# Altium PCB V0_1MiniFlyer-ZK.PcbDoc
Units mil, origin at the board's own origin, x right, y up, seen from the top; angles counter-clockwise.
Board outline 1500 x 1500 mil, 2 copper layers (Top Layer, Bottom Layer); 44 components, 36 nets, 202 pads, 17 vias.
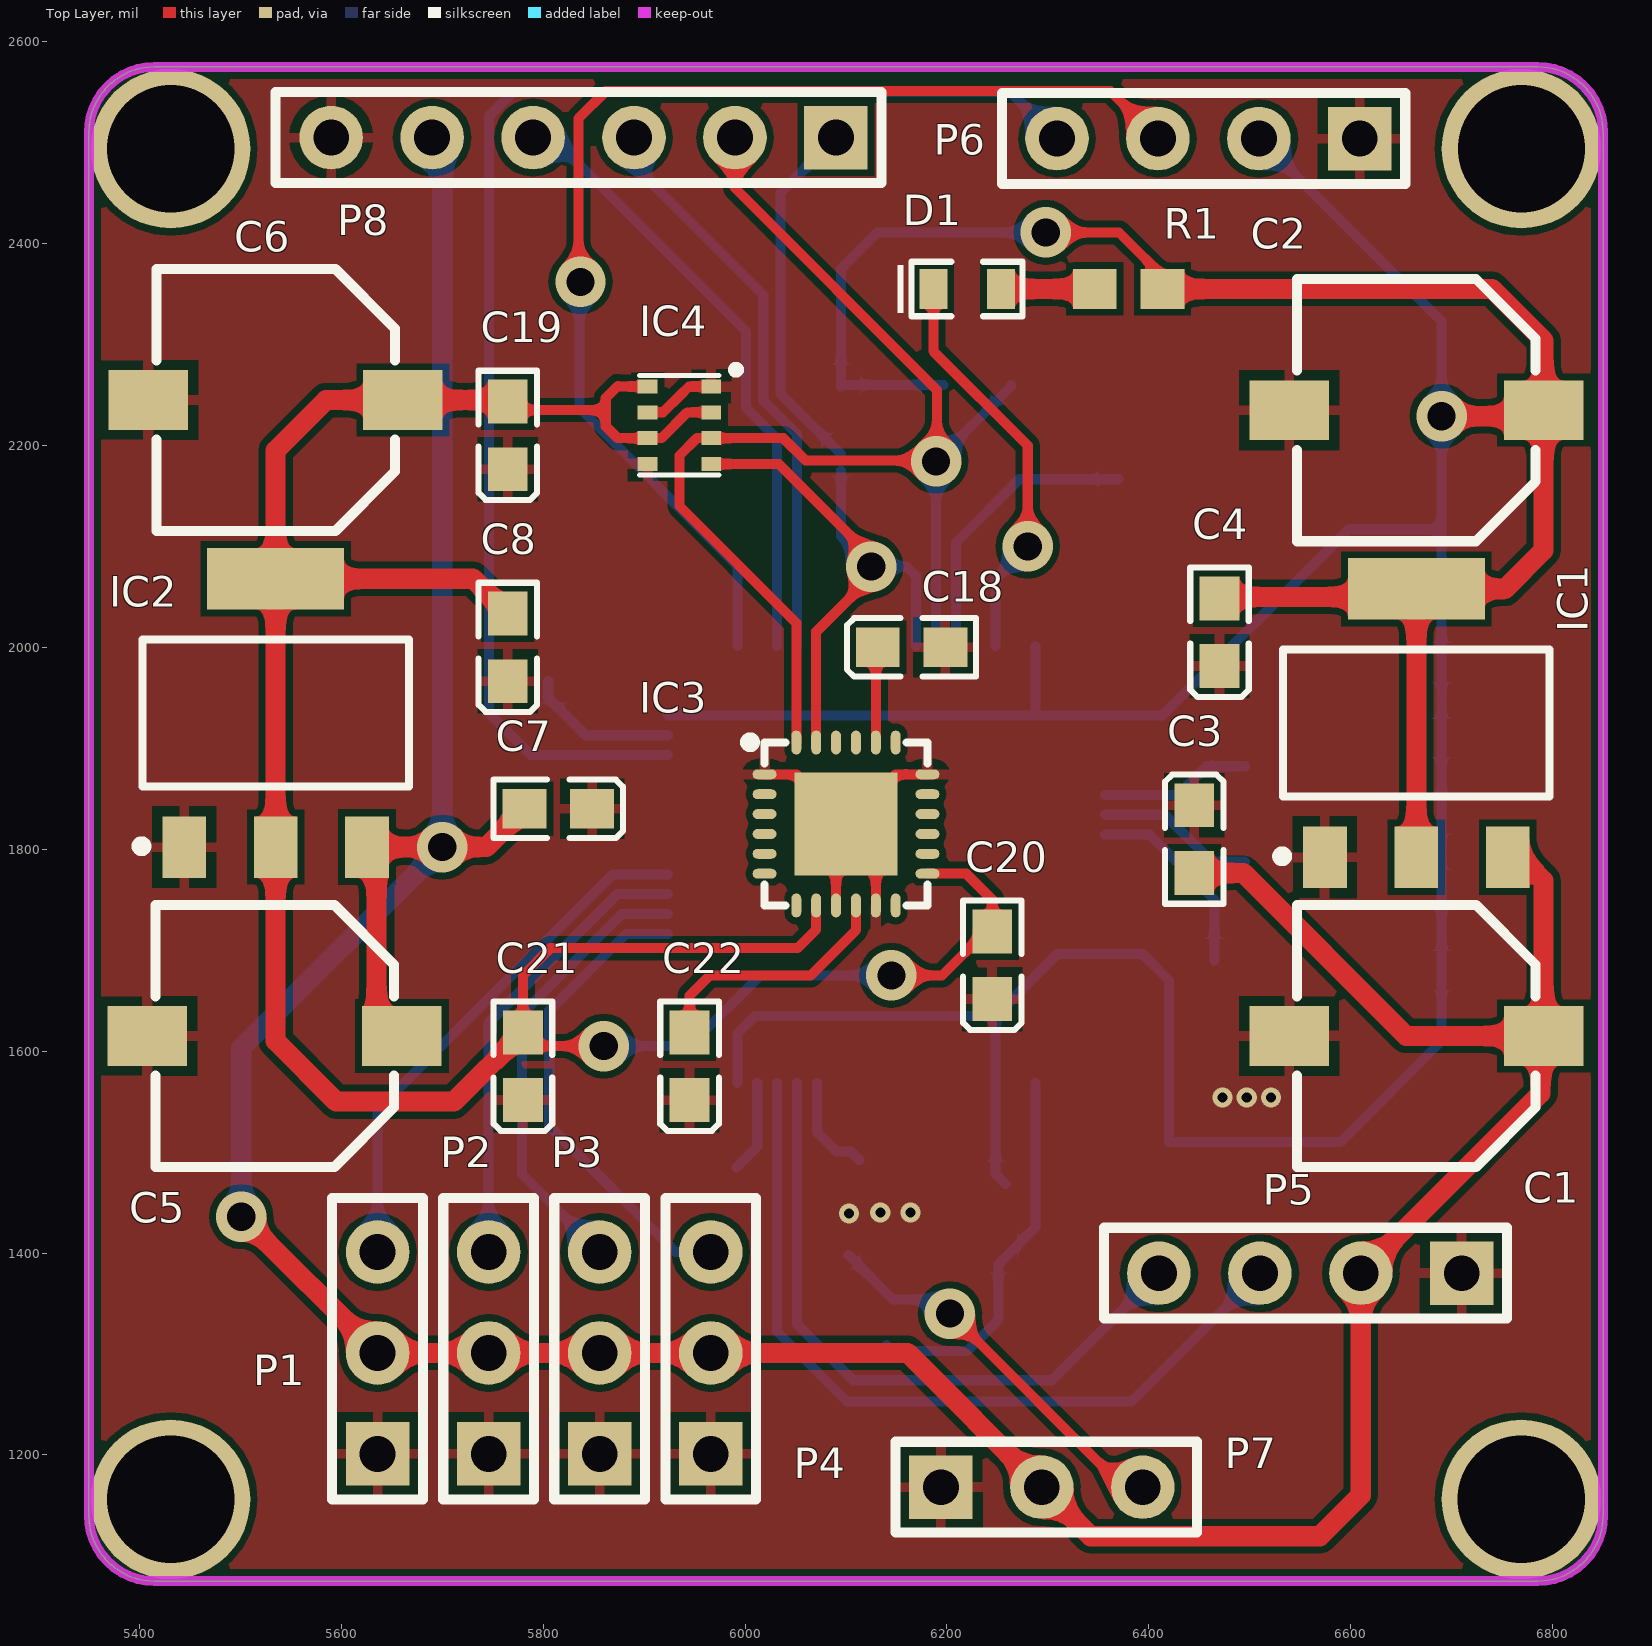
[diagram p0: Top Layer view]
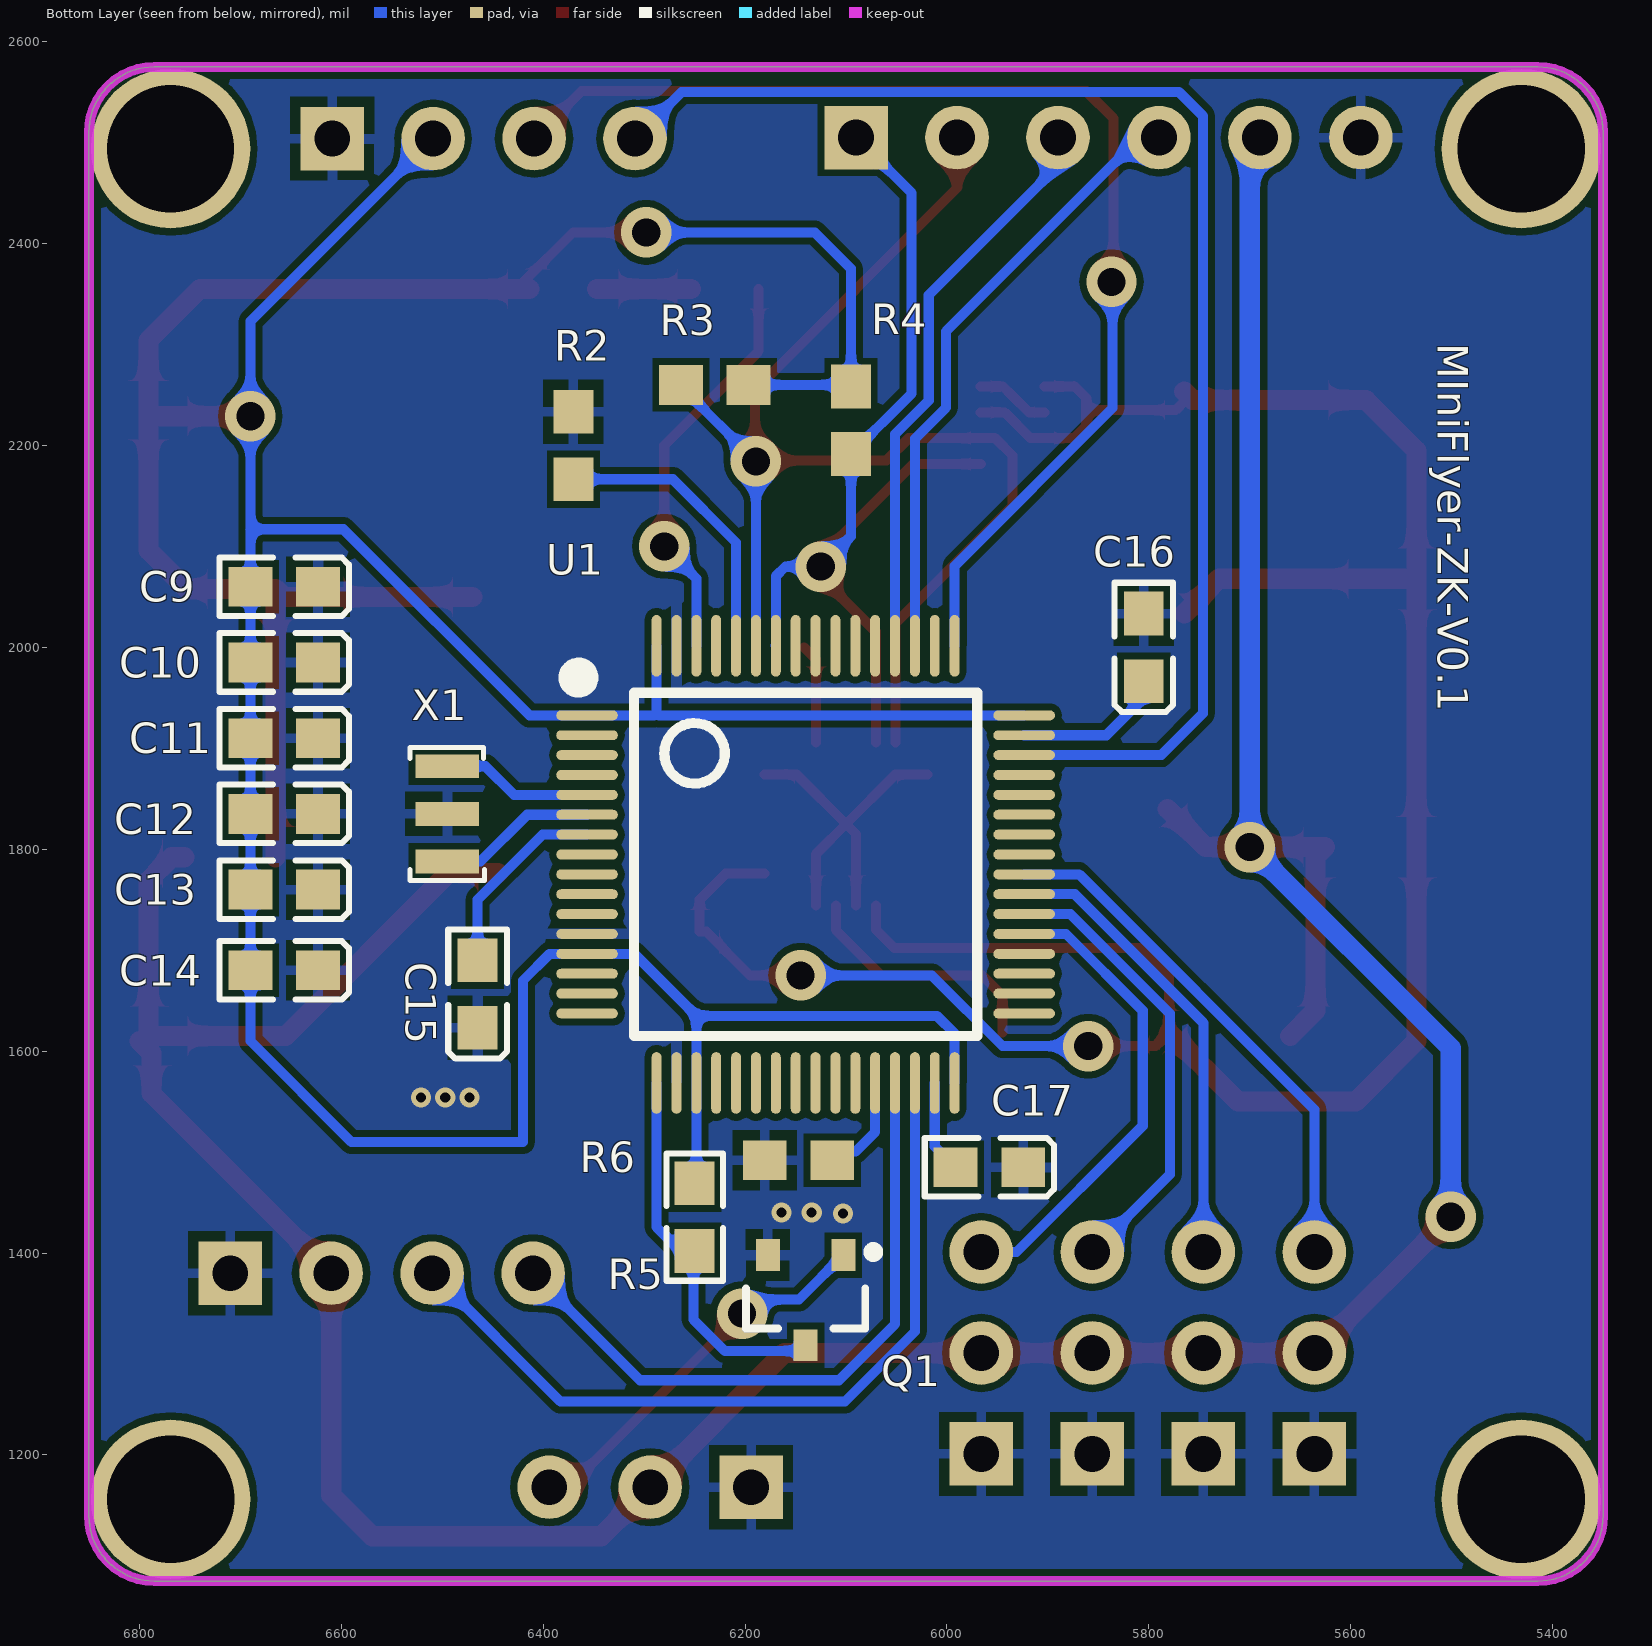
[diagram p1: Bottom Layer view, seen from below]
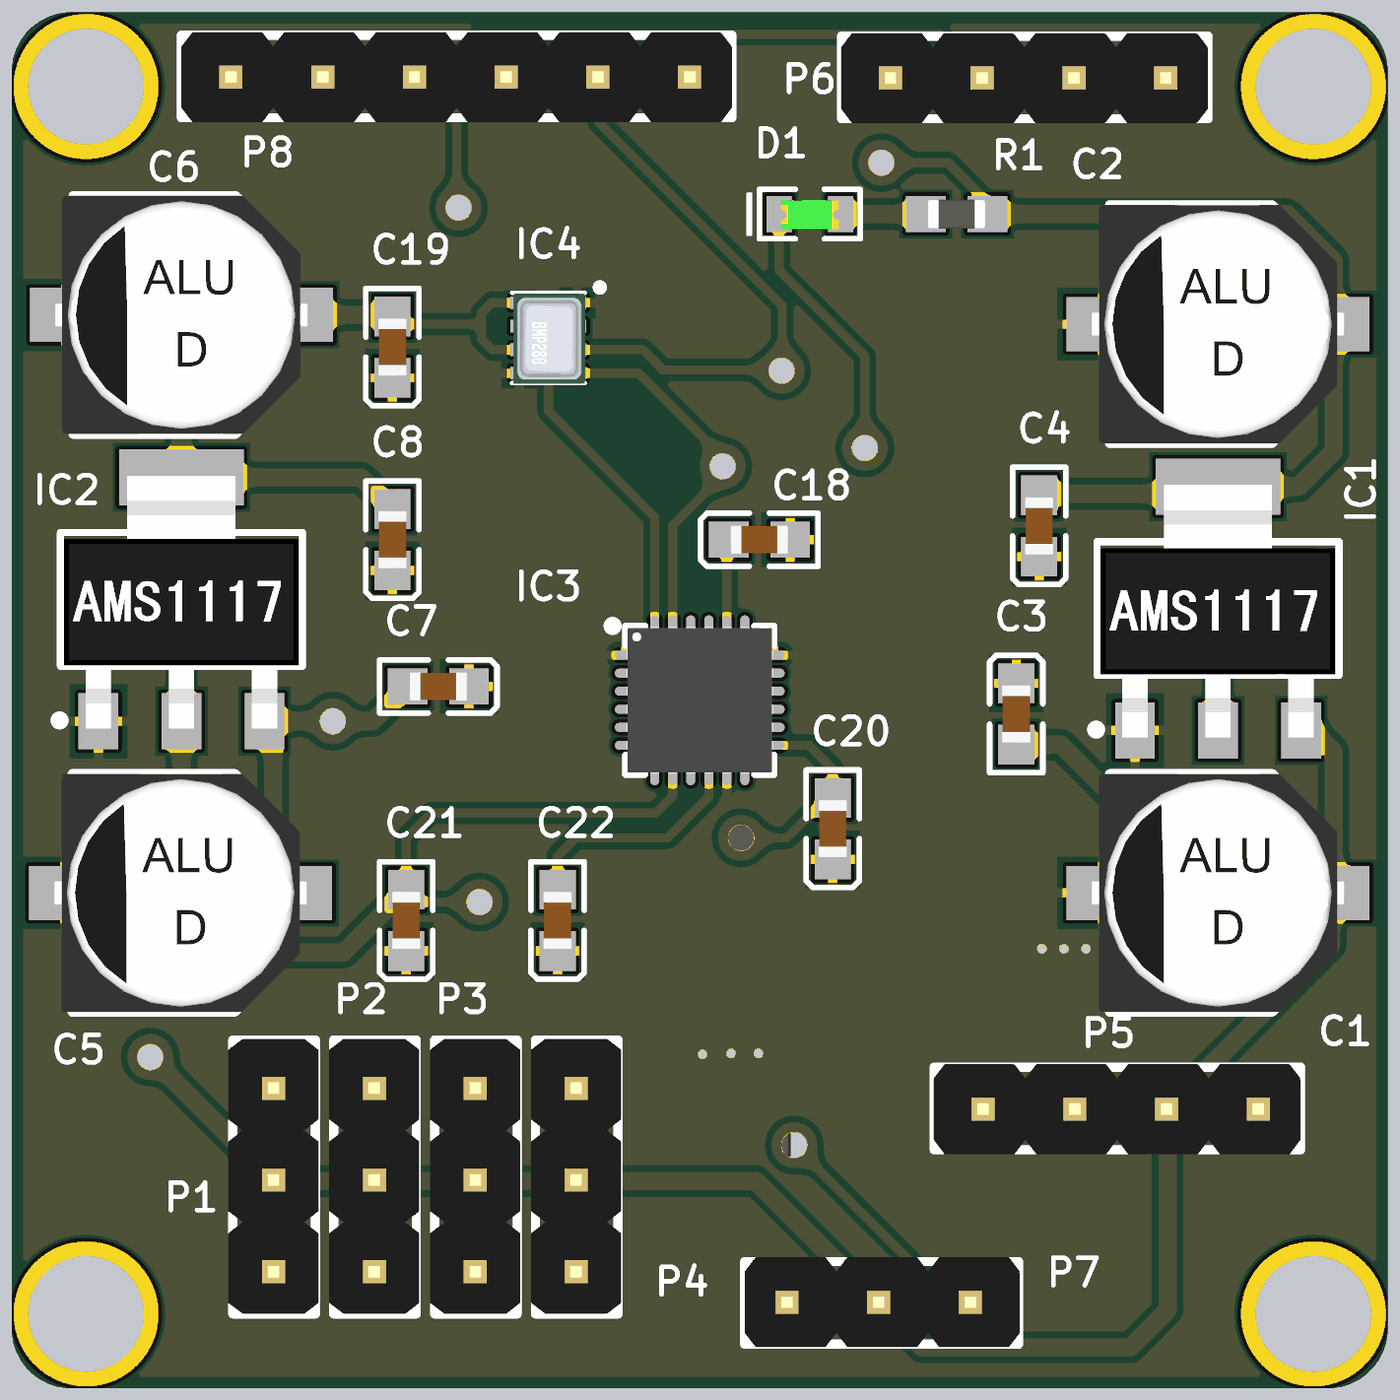
[diagram p2: 3D render of the assembled board from above, using the file's embedded part models]
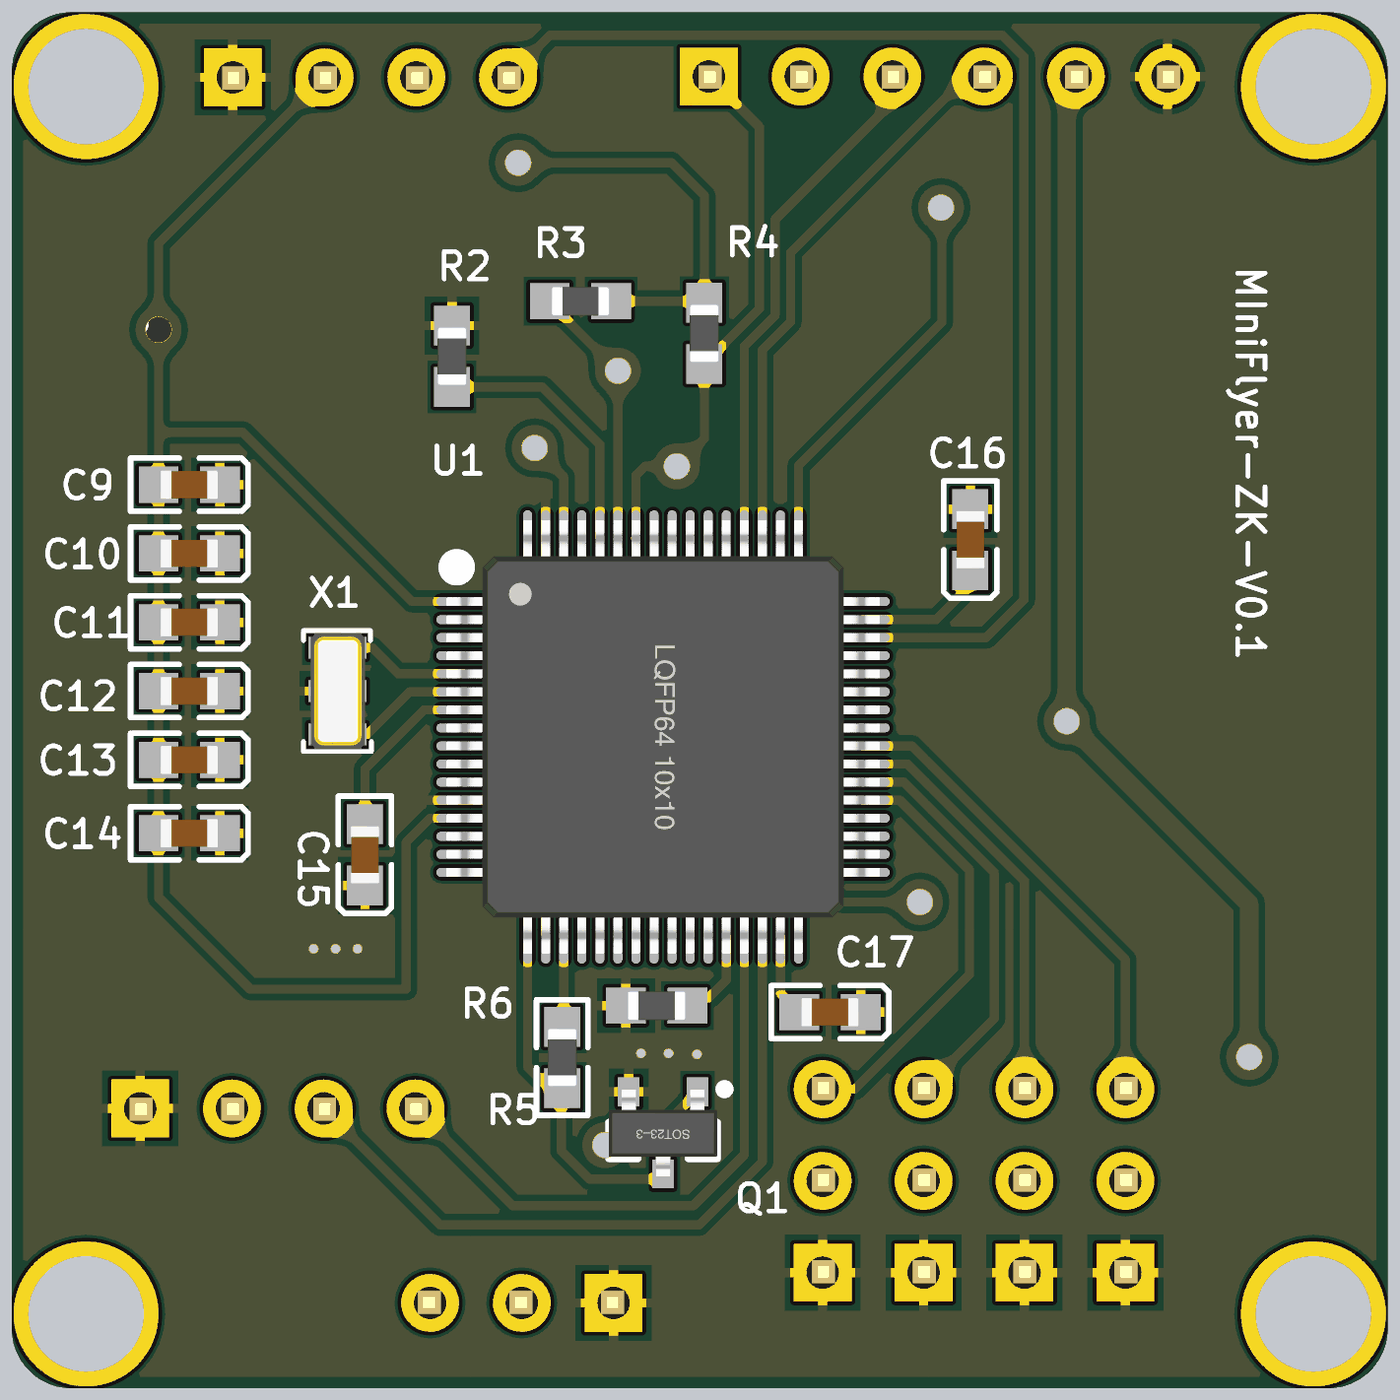
[diagram p3: 3D render of the assembled board from below, using the file's embedded part models]

## Layer stack, top to bottom
Top Solder: solder mask 0.4, Solder Resist, Dk 3.5
Top Layer: signal copper 1.4
Dielectric 1: dielectric 12.6, FR-4, Dk 4.8
Bottom Layer: signal copper 1.4
Bottom Solder: solder mask 0.4, Solder Resist, Dk 3.5

## Board outline
5350,1140 5350,2510 cw(c5415,2510) 5415,2575 6785,2575 cw(c6785,2510) 6850,2510 6850,1140 cw(c6785,1140) 6785,1075 5415,1075 cw(c5415,1140)

## Design rules (kind name [scope] priority, off if disabled: settings)
Clearance [All] p1: gap=7
PolygonConnect [All] p1: connectstyle=Relief reliefconductorwidth=10 reliefentries=4 polygonreliefangle="90 Angle" airgapwidth=10
RoutingVias [All] p1: holewidth=10 width=20 viastyle="Through Hole" minholewidth=10 minwidth=20 maxholewidth=10 maxwidth=20
SolderMaskExpansion [All] p1: expansion=4
Width [All] p1: maxlimit=20 minlimit=10 preferedwidth=10 minimp=50.000000 maximp=50.000000 favimp=50.000000
30 further rules are at their usual default settings.

## Components (designator, comment, footprint, x,y, rotation, side; value= is the part's Value field where it differs from the comment)
C1 "220uf" CAPE_D_6.3X6.6X5.4 6665,1615 r0 top
C2 "220uf" CAPE_D_6.3X6.6X5.4 6665,2235 r0 top
C3 "0.1uf" Cap-0603 6445,1810 r270 top
C4 "0.1uf" Cap-0603 6470,2015 r90 top
C5 "220uf" CAPE_D_6.3X6.6X5.4 5534.02,1615 r0 top
C6 "220uf" CAPE_D_6.3X6.6X5.4 5535,2245 r0 top
C7 "0.1uf" Cap-0603 5815,1840 r180 top
C8 "0.1uf" Cap-0603 5765,2000 r90 top
C9 "0.1uf" Cap-0603 6656.54,2060 r0 bottom
C10 "0.1uf" Cap-0603 6656.54,1985 r0 bottom
C11 "0.1uf" Cap-0603 6656.54,1910 r0 bottom
C12 "0.1uf" Cap-0603 6656.54,1835 r0 bottom
C13 "0.1uf" Cap-0603 6656.54,1760 r0 bottom
C14 "0.1uf" Cap-0603 6656.54,1680 r0 bottom
C15 "0.1uf" Cap-0603 6465,1656.54 r90 bottom
C16 "2.2uf" Cap-0603 5805,2000 r90 bottom
C17 "2.2uf" Cap-0603 5958,1485 r0 bottom
C18 "2.2nf" Cap-0603 6165,2000 r0 top
C19 "0.1uf" Cap-0603 5765,2210 r90 top
C20 "0.1uf" Cap-0603 6245,1685 r90 top
C21 "10nf" Cap-0603 5780,1585 r90 top
C22 "0.1uf" Cap-0603 5945,1585 r90 top
D1 "LED_SMD_GREEN" LED_0603_G 6220,2355 r180 top
IC1 "AMS1117-3.3" AMS1117 6665,1925 r0 top
IC2 "AMS1117-3.3" AMS1117 5535,1935 r0 top
IC3 "MPU-6050" "QFN24 4X4_N" 6100,1825 r0 top locked
IC4 "BMP280" "BMP280 LGA8" 5935,2220 r180 top
P1 "PWM1" "Header 2.54X3" 5636,1301 r90 top
P2 "PWM2" "Header 2.54X3" 5746,1301 r90 top
P3 "PWM3" "Header 2.54X3" 5856,1301 r90 top
P4 "PWM4" "Header 2.54X3" 5966,1301 r90 top
P5 "UART1" "Header 2.54X4" 6560,1380 r180 top
P6 "SWD" "Header 2.54X4" 6459,2504 r180 top
P7 "SBUS" "Header 2.54X3" 6294,1168 r0 top
P8 "GPS" "Header 2.54X6" 5840,2505 r180 top
Q1 "SS8050" SOT23-3L 6140,1353 r0 bottom
R1 "330R" Res-0603-M 6380,2355 r0 top
R2 "10K" Res-0603-M 6370,2200 r90 bottom
R3 "4.7K" Res-0603-M 6230,2260 r180 bottom
R4 "4.7K" Res-0603-M 6095,2225 r90 bottom
R5 "10K" Res-0603 6250,1435.54 r270 bottom
R6 "10K" Res-0603-M 6147,1492 r180 bottom
U1 "STM32F405RGT6" "LQFP64 10X10_L" 6140,1785 r270 bottom
X1 "8MHz" XTAL-3215-3P 6495,1835 r270 bottom

## Footprints (in the part's own frame and the unit in brackets; to place one, negate y for a bottom-side part, rotate by r counter-clockwise, add the part's x,y. Pads: shape width x height; smd on the part's side, far side on the other; paste and mask are expansions set on the pad)
AMS1117 [mm]
  rect 1.1x1.55 smd: 1(-2.3,-3.375) 2(0,-3.375) 3(2.3,-3.375)
  rect 3.45x1.55 smd: 4(0,3.375)
  silkscreen extent -3.5,-3.48 3.35,1.85, body extent -3.25,-3.58 3.25,3.42, height 1.85
"BMP280 LGA8" [mm]
  rect 0.5x0.35 smd: 1(-0.8,-0.975) 2(-0.8,-0.325) 3(-0.8,0.325) 4(-0.8,0.975) 5(0.8,0.975) 6(0.8,0.325) 7(0.8,-0.325) 8(0.8,-0.975)
  silkscreen extent -1.52,-1.5 1,1.25, body extent -1.03,-1.23 0.97,1.27, height 1
Cap-0603 [mm]
  rect 1.1x1 smd: 1(-0.85,0) 2(0.85,0)
  silkscreen extent -1.63,-0.74 1.63,0.74, body extent -0.8,-0.4 0.8,0.4, height 0.6
CAPE_D_6.3X6.6X5.4 [mm]
  rect 2x1.5 smd: 1(3.2,0) 2(-3.2,0)
  silkscreen extent -3,-3.3 3,3.3, body extent -3.5,-3.3 3.5,3.3, height 5.4
"Header 2.54X3" [mm]
  rect 1.6x1.6 hole 0.9: 1(-2.54,0)
  round 1.6 hole 0.9: 2(0,0) 3(2.54,0)
  silkscreen extent -3.68,-1.14 3.9,1.14, body extent -3.68,-1.23 3.94,1.27, height 8.3
"Header 2.54X4" [mm]
  rect 1.6x1.6 hole 0.9: 1(-3.81,0)
  round 1.6 hole 0.9: 2(-1.27,0) 3(1.27,0) 4(3.81,0)
  silkscreen extent -4.95,-1.14 5.19,1.14, body extent -4.95,-1.23 5.21,1.27, height 8.3
"Header 2.54X6" [mm]
  rect 1.6x1.6 hole 0.9: 1(-6.35,0)
  round 1.6 hole 0.9: 2(-3.81,0) 3(-1.27,0) 4(1.27,0) 5(3.81,0) 6(6.35,0)
  silkscreen extent -7.49,-1.14 7.75,1.14, body extent -7.49,-1.23 7.75,1.27, height 8.3
LED_0603_G [mm]
  rect 0.7x1 smd: 1(-0.85,0) 2(0.85,0)
  silkscreen extent -1.4,-0.69 1.75,0.69, body extent -0.8,-0.38 0.8,0.42, height 0.61
"LQFP64 10X10_L" [mm]
  oval 0.25x1.55 smd: 1(-3.75,-5.5) 2(-3.25,-5.5) 3(-2.75,-5.5) 4(-2.25,-5.5) 5(-1.75,-5.5) 6(-1.25,-5.5) 7(-0.75,-5.5) 8(-0.25,-5.5) 9(0.25,-5.5) 10(0.75,-5.5) 11(1.25,-5.5) 12(1.75,-5.5) 13(2.25,-5.5) 14(2.75,-5.5) 15(3.25,-5.5) 16(3.75,-5.5) 33(3.75,5.5) 34(3.25,5.5) 35(2.75,5.5) 36(2.25,5.5) 37(1.75,5.5) 38(1.25,5.5) 39(0.75,5.5) 40(0.25,5.5) 41(-0.25,5.5) 42(-0.75,5.5) 43(-1.25,5.5) 44(-1.75,5.5) 45(-2.25,5.5) 46(-2.75,5.5) 47(-3.25,5.5) 48(-3.75,5.5)
  oval 1.55x0.25 smd: 17(5.5,-3.75) 18(5.5,-3.25) 19(5.5,-2.75) 20(5.5,-2.25) 21(5.5,-1.75) 22(5.5,-1.25) 23(5.5,-0.75) 24(5.5,-0.25) 25(5.5,0.25) 26(5.5,0.75) 27(5.5,1.25) 28(5.5,1.75) 29(5.5,2.25) 30(5.5,2.75) 31(5.5,3.25) 32(5.5,3.75) 49(-5.499,3.75) 50(-5.499,3.25) 51(-5.499,2.75) 52(-5.499,2.25) 53(-5.499,1.75) 54(-5.499,1.25) 55(-5.499,0.75) 56(-5.499,0.25) 57(-5.499,-0.25) 58(-5.499,-0.75) 59(-5.499,-1.25) 60(-5.499,-1.75) 61(-5.499,-2.25) 62(-5.499,-2.75) 63(-5.499,-3.25) 64(-5.499,-3.75)
  silkscreen extent -4.95,-5.96 4.32,4.32, body extent -6,-6 6,6, height 1.45
"QFN24 4X4_N" [mm]
  rect 2.6x2.6 smd: 0(0,0)
  oval 0.6x0.25 smd: 1(-2.05,1.25) 2(-2.05,0.75) 3(-2.05,0.25) 4(-2.05,-0.25) 5(-2.05,-0.75) 6(-2.05,-1.25) 13(2.05,-1.25) 14(2.05,-0.75) 15(2.05,-0.25) 16(2.05,0.25) 17(2.05,0.75) 18(2.05,1.25)
  oval 0.25x0.6 smd: 7(-1.25,-2.05) 8(-0.75,-2.05) 9(-0.25,-2.05) 10(0.25,-2.05) 11(0.75,-2.05) 12(1.25,-2.05) 19(1.25,2.05) 20(0.75,2.05) 21(0.25,2.05) 22(-0.25,2.05) 23(-0.75,2.05) 24(-1.25,2.05)
  silkscreen extent -2.54,-2.05 2.05,2.18, body extent -2.02,-2.02 2.02,2.02, height 0.88
Res-0603 [mm]
  rect 1.1x1 smd: 1(-0.85,0) 2(0.85,0)
  silkscreen extent -1.6,-0.71 1.6,0.71, body extent -0.8,-0.4 0.8,0.4, height 0.38
Res-0603-M [mm]
  rect 1.1x1 smd: 1(-0.85,0) 2(0.85,0)
  body extent -0.8,-0.4 0.8,0.4, height 0.38
SOT23-3L [mm]
  rect 0.6x0.8 smd: 1(-0.95,-1.143) 2(0.95,-1.143) 3(0,1.125)
  silkscreen extent -1.83,-1.34 1.5,0.7, body extent -1.5,-1.2 1.5,1.2, height 1.05
XTAL-3215-3P [mm]
  rect 0.6x1.6 smd: 1(-1.2,0) 2(0,0) 3(1.2,0)
  silkscreen extent -1.68,-0.94 1.68,0.94, body extent -1.6,-0.74 1.6,0.76, height 0.9

## Part data
C1 C2 C5 C6: library part CAPE-SMD, "贴片电解电容"
C3 C4 C7 C8 C9 C10 C11 C12 C13 C14 C15 C16 C17 C18 C19 C20 C21 C22: library part CAP, "贴片陶瓷电容"
D1: "发光二极管"
IC1 IC2: library part AMS1117
IC3: library part MPU-6000, "传感器"
IC4: "气压传感器"
P1 P2 P3 P4 P7: library part Header_3
P5 P6: library part Header_4
P8: library part Header_6
Q1: library part 8050-SMD, "高频放大-NPN型"
R1 R2 R3 R4 R5 R6: library part RES, "贴片电阻"
U1: "Flaah:256/RAM:48/IO:51"
X1: library part XTAL-3P, "3脚无源晶振"

## Free pads (board coordinates)
  round 158 hole 126: 5(5431,2494) 6(6769.02,2494) 7(5431,1156) 8(6769,1156)

## Via types
v1: diameter 50, hole 28, Top Layer to Bottom Layer, tented both sides, 11 vias
v2: diameter 20, hole 10, Top Layer to Bottom Layer, tented both sides, 6 vias

## Nets (pads, with @x,y where several pads share a name; then routed paths per layer and width w, separated by ;. In a path a pad name is that pad's centre, name@x,y a point inside that pad or via, vN(x,y) a via of type N, cw(c..) or ccw(c..) an arc to the next point about the centre after c; other vN are vias at no path point)
3.3V: C2.1 C4.2 C9.2 C10.2 C11.2 C12.2 C13.2 C14.2 IC1.2 IC1.4 P6.2 R1.2 R3.2 R4.2 R5.1 U1.1 U1.13 U1.19 U1.32 U1.48 U1.64 | length 4946.2
  Top Layer w10: v1(6298,2411) 6370.54,2411 6420,2361.54 R1.2 ; C2.1@6784.98,2229 C2.1
  Top Layer w20: R1.2 6740,2355 6790.98,2304.02 C2.1 6790.98,2095.98 6752.87,2057.87 IC1.4 ; C4.2@6470,2050 6657.13,2050 IC1.4 ; IC1.2 IC1.4 ; v1(6690,2229) C2.1@6784.98,2229
  Bottom Layer w10: U1.48 6285.27,1932.63 6287.64,1935 ; U1.32 5992.37,1617.37 6010,1635 6248.27,1635 ; R4.2 R4.2@6095,2260 ; R3.2 R4.2@6095,2260 ; R5.1@6258,1468.46 6248.27,1478.19 U1.19 6248.27,1635 ; U1.64 6287.64,1935 ; v1(6298,2411) 6131,2411 6095,2375 R4.2@6095,2260 ; P6.2 6690,2323 v1(6690,2229) 6690,2117 ; 6248.27,1635 6309.68,1696.41 U1.13 6393.59,1696.41 6420,1670 6420,1510 6590,1510 6690,1610 C14.2 C13.2 C12.2 C11.2 C10.2 C9.2 6690,2117 ; 6287.64,1935 6290.01,1932.63 U1.1 6413.63,1932.63 6598,2117 6690,2117
3.3V_SEN: C6.1 C8.2 C19.2 C20.2 C21.2 IC2.2 IC2.4 IC3.8 IC3.13 IC4.2 IC4.6 IC4.8 | length 2691
  Top Layer w10: C19.2 5773.46,2235 5862,2235 ; v1(5860,1605) 5793.46,1605 C21.2 5780,1675 5807,1702 6052,1702 6070.47,1720.47 IC3.8 ; IC4.8 5874,2258.39 5874,2259 5862,2247 5862,2235 ; IC4.2 5942.8,2232.8 5917.2,2207.2 IC4.6 5873.8,2207.2 5862,2219 5862,2235 ; v1(6145,1675) 6195,1675 6238.46,1718.46 C20.2 6245,1750 6219.21,1775.79 IC3.13
  Top Layer w20: C8.2 5730.59,2067.87 IC2.4 ; C19.2@5765,2253.46 5756.54,2245 C6.1 5585,2245 5535,2195 IC2.4 ; C21.2 5711.54,1550 5595,1550 5535,1610 IC2.2 IC2.4
  Bottom Layer w10: v1(5860,1605) 5945,1605 6015,1675 v1(6145,1675)
5V: C1.1 C3.2 C5.1 C7.2 IC1.3 IC2.3 P1.2 P2.2 P3.2 P4.2 P5.2 P7.2 P8.5 | length 3893.7
  Top Layer w20: v1(5501,1436) P1.2 P2.2 P3.2 P4.2 6161,1301 P7.2 6342.5,1119.5 6569.5,1119.5 6610,1160 P5.2 ; C5.1 5635,1640 5635,1792.68 IC2.3 v1(5700,1802.13) 5743.66,1802.13 C7.2 ; C3.2 6493.46,1776.54 6655,1615 C1.1 6790.98,1769.02 6767.87,1792.13 IC1.3 ; P5.2@6630,1400 6788,1558 6788,1598 C1.1@6800,1610
  Bottom Layer w20: v1(5501,1436) 5501,1603.13 v1(5700,1802.13) P8.5@5700,2505
GND: C1.2 C2.2 C3.1 C4.1 C5.2 C6.2 C7.1 C8.1 C9.1 C10.1 C11.1 C12.1 C13.1 C14.1 C15.1 C16.2 C17.1 C18.2 C19.1 C20.1 C21.1 C22.1 IC1.1 IC2.1 IC3.0 IC3.1 IC3.9 IC3.11 IC3.18 IC4.1 IC4.5 IC4.7 P1.1 P2.1 P3.1 P4.1 P5.1 P6.1 P7.1 P8.6 Q1.2 R2.2 R6.1 U1.12 U1.18 U1.63 X1.2 | length 453.5
  Top Layer w10: IC4.7 5918.75,2232.8 5935.75,2249.8 ; 5935.8,2249.8 5944.39,2258.39 IC4.1 ; IC3.1 6050.79,1874.21 IC3.0 ; IC3.9 6090.16,1815.16 IC3.0 ; IC3.11 6129.53,1795.47 IC3.0 ; IC3.18 6149.21,1874.21 IC3.0
  other v2: 6103,1439 6134,1440 6164,1440 6473,1554 6497,1554 6521,1554
IIC1_SCL: IC3.23 IC4.4 P8.1 R4.1 U1.58 | length 994.1
  Top Layer w10: IC4.4 6033.39,2181.61 6130,2085 6130,2075 6070.47,2015.47 IC3.23
  Bottom Layer w10: P8.1 6035,2450 6035,2251.54 R4.1 ; R4.1@6095,2175 6095,2110 v1(6125,2080) 6160,2080 6169.53,2070.47 U1.58 U1.58@6170,2001.98
IIC1_SDA: IC3.24 IC4.3 P8.2 R3.1 U1.59 | length 1295.7
  Top Layer w10: P8.2 5990,2455 6190,2255 6190,2185 6060,2185 6037.8,2207.2 IC4.3 5952.2,2207.2 5935,2190 5935,2140 6050.79,2024.21 IC3.24
  Bottom Layer w10: U1.59 v1(6189.22,2184.22) 6263.46,2258.46 R3.1
LED0: D1.2 U1.62 | length 405.4
  Top Layer w10: D1.2 6186.54,2293.46 6280,2200 v1(6280,2100)
  Bottom Layer w10: U1.62 6248.27,2068.27 v1(6280,2100)
MPU_CS: U1.10
MPU_INT: U1.11
NetC15_2: C15.2 U1.7 | length 195.2
  Bottom Layer w10: U1.7 6400.48,1814.52 6465,1750 C15.2
NetC16_1: C16.1 U1.47 | length 150.4
  Bottom Layer w10: C16.1 5805,1950 5842.06,1912.94 U1.47
NetC17_2: C17.2 U1.31 | length 92
  Bottom Layer w10: C17.2 6012.05,1505.59 U1.31
NetC18_1: C18.1 IC3.20 | length 99.3
  Top Layer w10: IC3.20 6129.53,1987.99 C18.1@6141.54,2000
NetC22_2: C22.2 IC3.10 | length 252.7
  Top Layer w10: C22.2 5945,1655 5965,1675 6065,1675 6109.84,1719.84 IC3.10
NetD1_1: D1.1 R1.1 | length 93.1
  Top Layer w20: D1.1 R1.1
NetR2_1: R2.1 U1.60 | length 289.4
  Bottom Layer w10: U1.60 6208.9,2103.9 6271.54,2166.54 R2.1
NetR6_2: R6.2 U1.28 | length 102.6
  Bottom Layer w10: U1.28 6071.11,1519.89 6090.57,1500.43 6105.11,1500.43 R6.2
OSC_IN: U1.5 X1.1 | length 150.2
  Bottom Layer w10: U1.5 6428.89,1853.89 6457.24,1882.24 X1.1
OSC_OUT: U1.6 X1.3 | length 157.7
  Bottom Layer w10: U1.6 6415.8,1834.2 6462.24,1787.76 X1.3
PWM1: P4.3 U1.37 | length 474.8
  Bottom Layer w10: U1.37 5882.13,1716.09 5806,1639.96 5806,1526 5931,1401 P4.3
PWM2: P3.3 U1.38 | length 453.3
  Bottom Layer w10: P3.3 5779,1478 5779,1637 5877.78,1735.78 U1.38
PWM3: P2.3 U1.39 | length 457.3
  Bottom Layer w10: P2.3 5746,1628.04 5873.42,1755.46 U1.39
PWM4: P1.3 U1.40 | length 525.1
  Bottom Layer w10: P1.3 5636,1542.08 5869.06,1775.15 U1.40
SBUS: Q1.3 R5.2 U1.17 | length 375.9
  Bottom Layer w10: Q1.3 6145.71,1303 6220,1303 6251,1334 6251,1389 6287.64,1425.64 U1.17
SBUS_IN: P7.3 Q1.1 | length 386.7
  Top Layer w10: v1(6203,1340) 6375,1168 P7.3
  Bottom Layer w10: Q1.1 6146.6,1354 6189,1354 v1(6203,1340)
SPI1_MISO: U1.22
SPI1_MOSI: U1.23
SPI1_SCK: U1.21
SWCLK: P6.3 U1.49 | length 1193.2
  Top Layer w10: v1(5837,2362) 5835,2364 5835,2524 5862,2551 6362,2551 P6.3
  Bottom Layer w10: v1(5837,2362) 5836,2361 5836,2237 5992.37,2080.63 U1.49
SWDIO: P6.4 U1.46 | length 1377.4
  Bottom Layer w10: U1.46 5787.74,1893.26 5746.5,1934.5 5746.5,2526.51 5769.99,2550 6263,2550 P6.4
U1_RX: U1.43
U1_TX: U1.42
U3_RX: P5.3 U1.30 | length 805.8
  Bottom Layer w10: U1.30 6031.74,1322.26 6101,1253 6383,1253 P5.3
U3_TX: P5.4 U1.29 | length 664.4
  Bottom Layer w10: U1.29 6051.42,1329.58 6107,1274 6304,1274 P5.4
U4_RX: P8.3 U1.52 | length 570.4
  Bottom Layer w10: P8.3 5890,2477 6018,2349 6018,2244.49 6051.42,2211.07 U1.52
U4_TX: P8.4 U1.51 | length 614.7
  Bottom Layer w10: P8.4 5809,2505 6001,2313 6001,2237.45 6031.74,2206.72 U1.51
pads on no net: IC3.2 IC3.3 IC3.4 IC3.5 IC3.6 IC3.7 IC3.12 IC3.14 IC3.15 IC3.16 IC3.17 IC3.19 IC3.21 IC3.22 U1.2 U1.3 U1.4 U1.8 U1.9 U1.14 U1.15 U1.16 U1.20 U1.24 U1.25 U1.26 U1.27 U1.33 U1.34 U1.35 U1.36 U1.41 U1.44 U1.45 U1.50 U1.53 U1.54 U1.55 U1.56 U1.57 U1.61

## Polygon pours and split planes (outlines as drawn)
GND on Bottom Layer "Bottom Layer-No Net" (solid, remove dead copper, pour order 0): 5350,2510 5350,1140 5350,1115 5382,1083 5390,1075 6785,1075 6850,1140 6850,2510 6850,2521 6795,2576 6794,2575 5433,2575 5415,2575 5350,2510
GND on Top Layer "t" (solid, remove dead copper, pour order 2): 5354,2505 5350,2501 5350,1140 5356,1140 5424,1072 5427,1075 6769,1075 6785,1075 6850,1140 6850,2503 6850,2510 6785,2575 5433,2575 5415,2575 5350,2510

## Keep-outs
Keep-Out Layer:
  the board outline again, w10

## Silkscreen, mask and mechanical layers (free items; w line width, h text height)
Bottom Overlay:
  text "MIniFlyer-ZK-V0.1" at 5514,2301 h30 r90